# Altium PCB SensorThing v1.0.PcbDoc
Units mm, origin at the board's own origin, x right, y up, seen from the top; angles counter-clockwise.
Board outline 43 x 38.3 mm, 2 copper layers (Top Layer, Bottom Layer), stack 1.671 mm thick; 76 components, 67 nets, 323 pads, 306 vias.
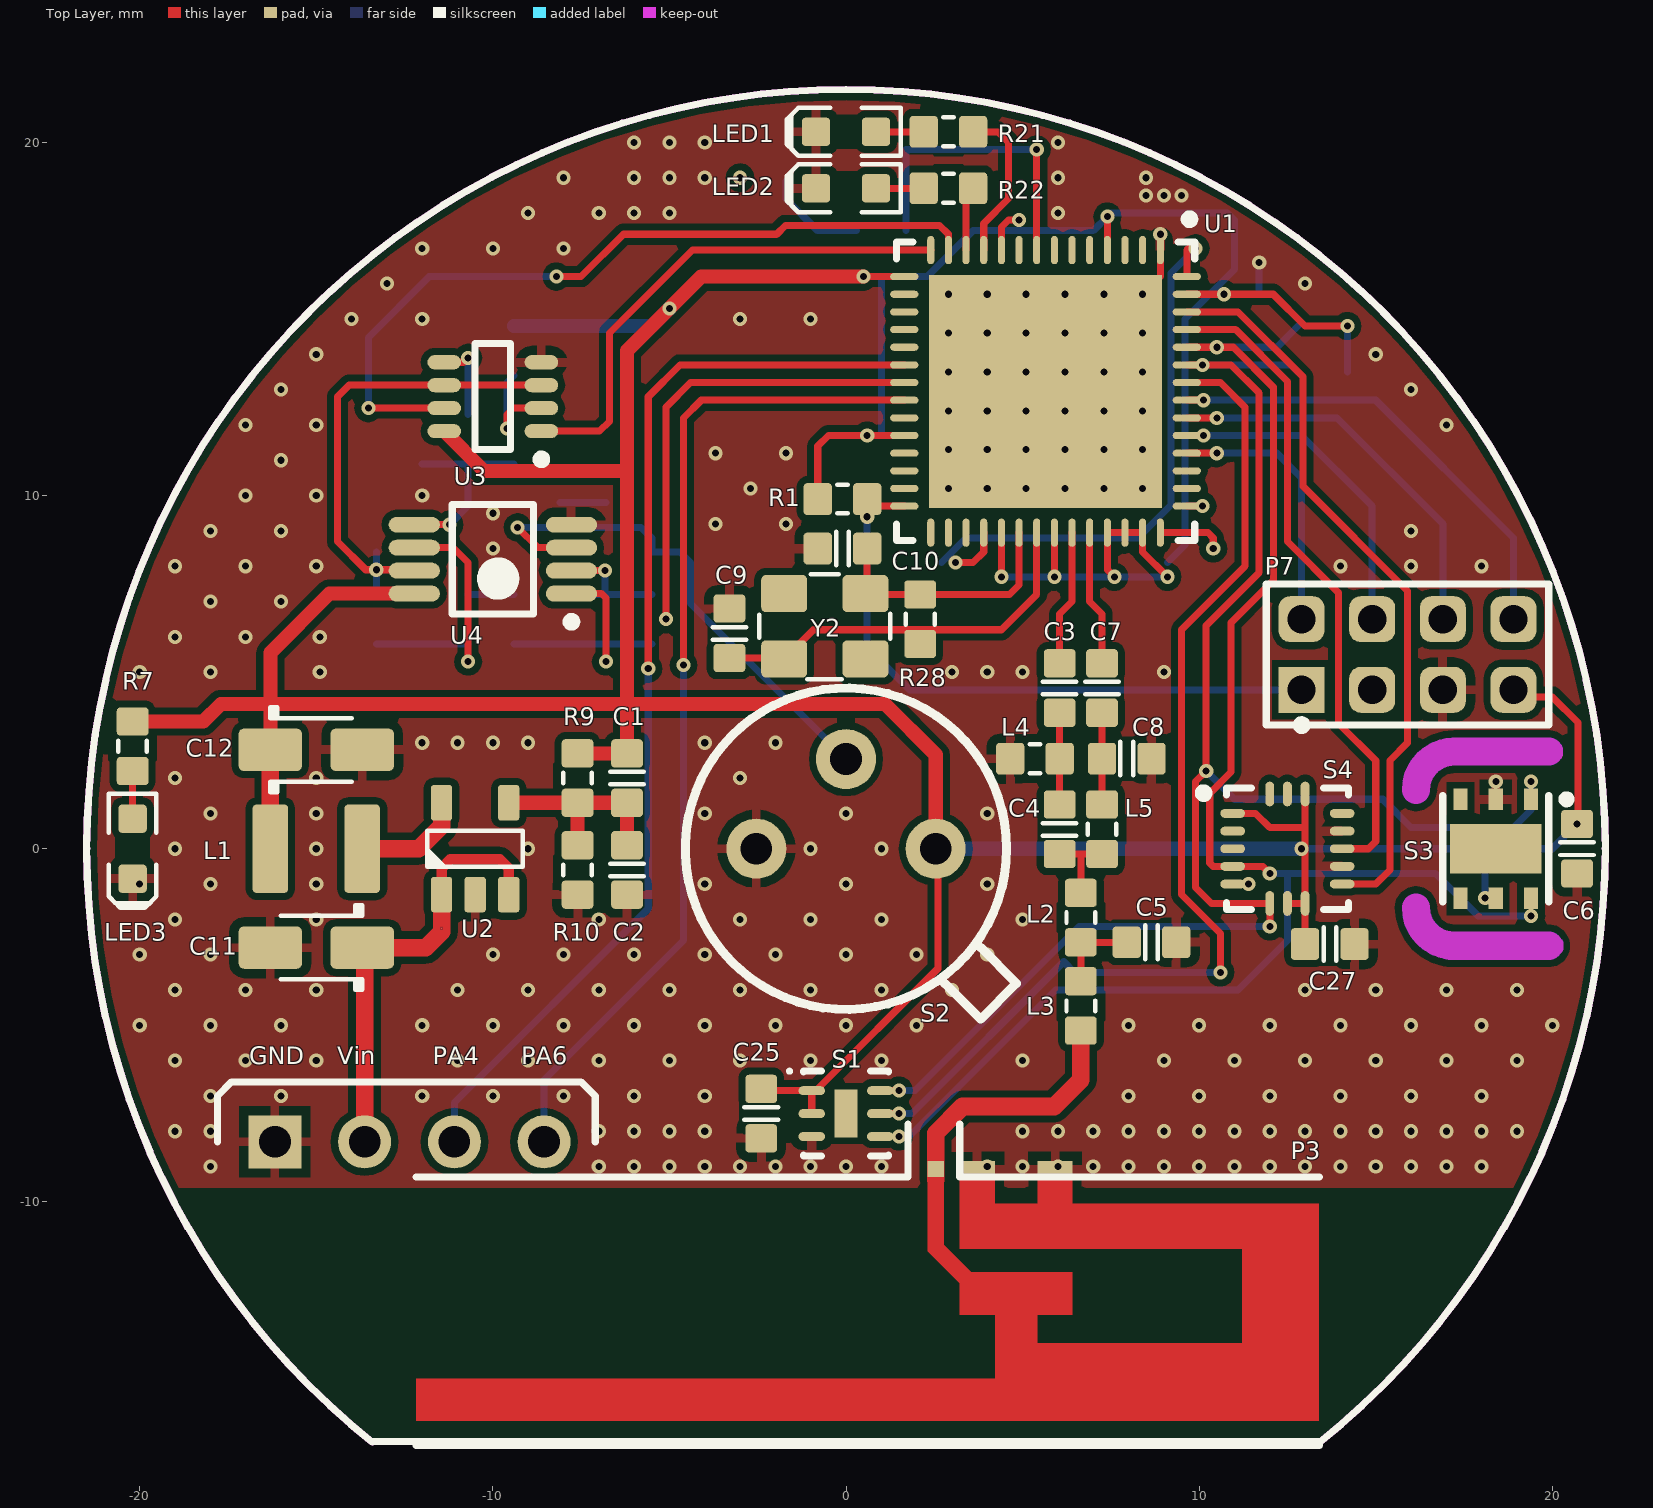
[diagram p0: Top Layer view]
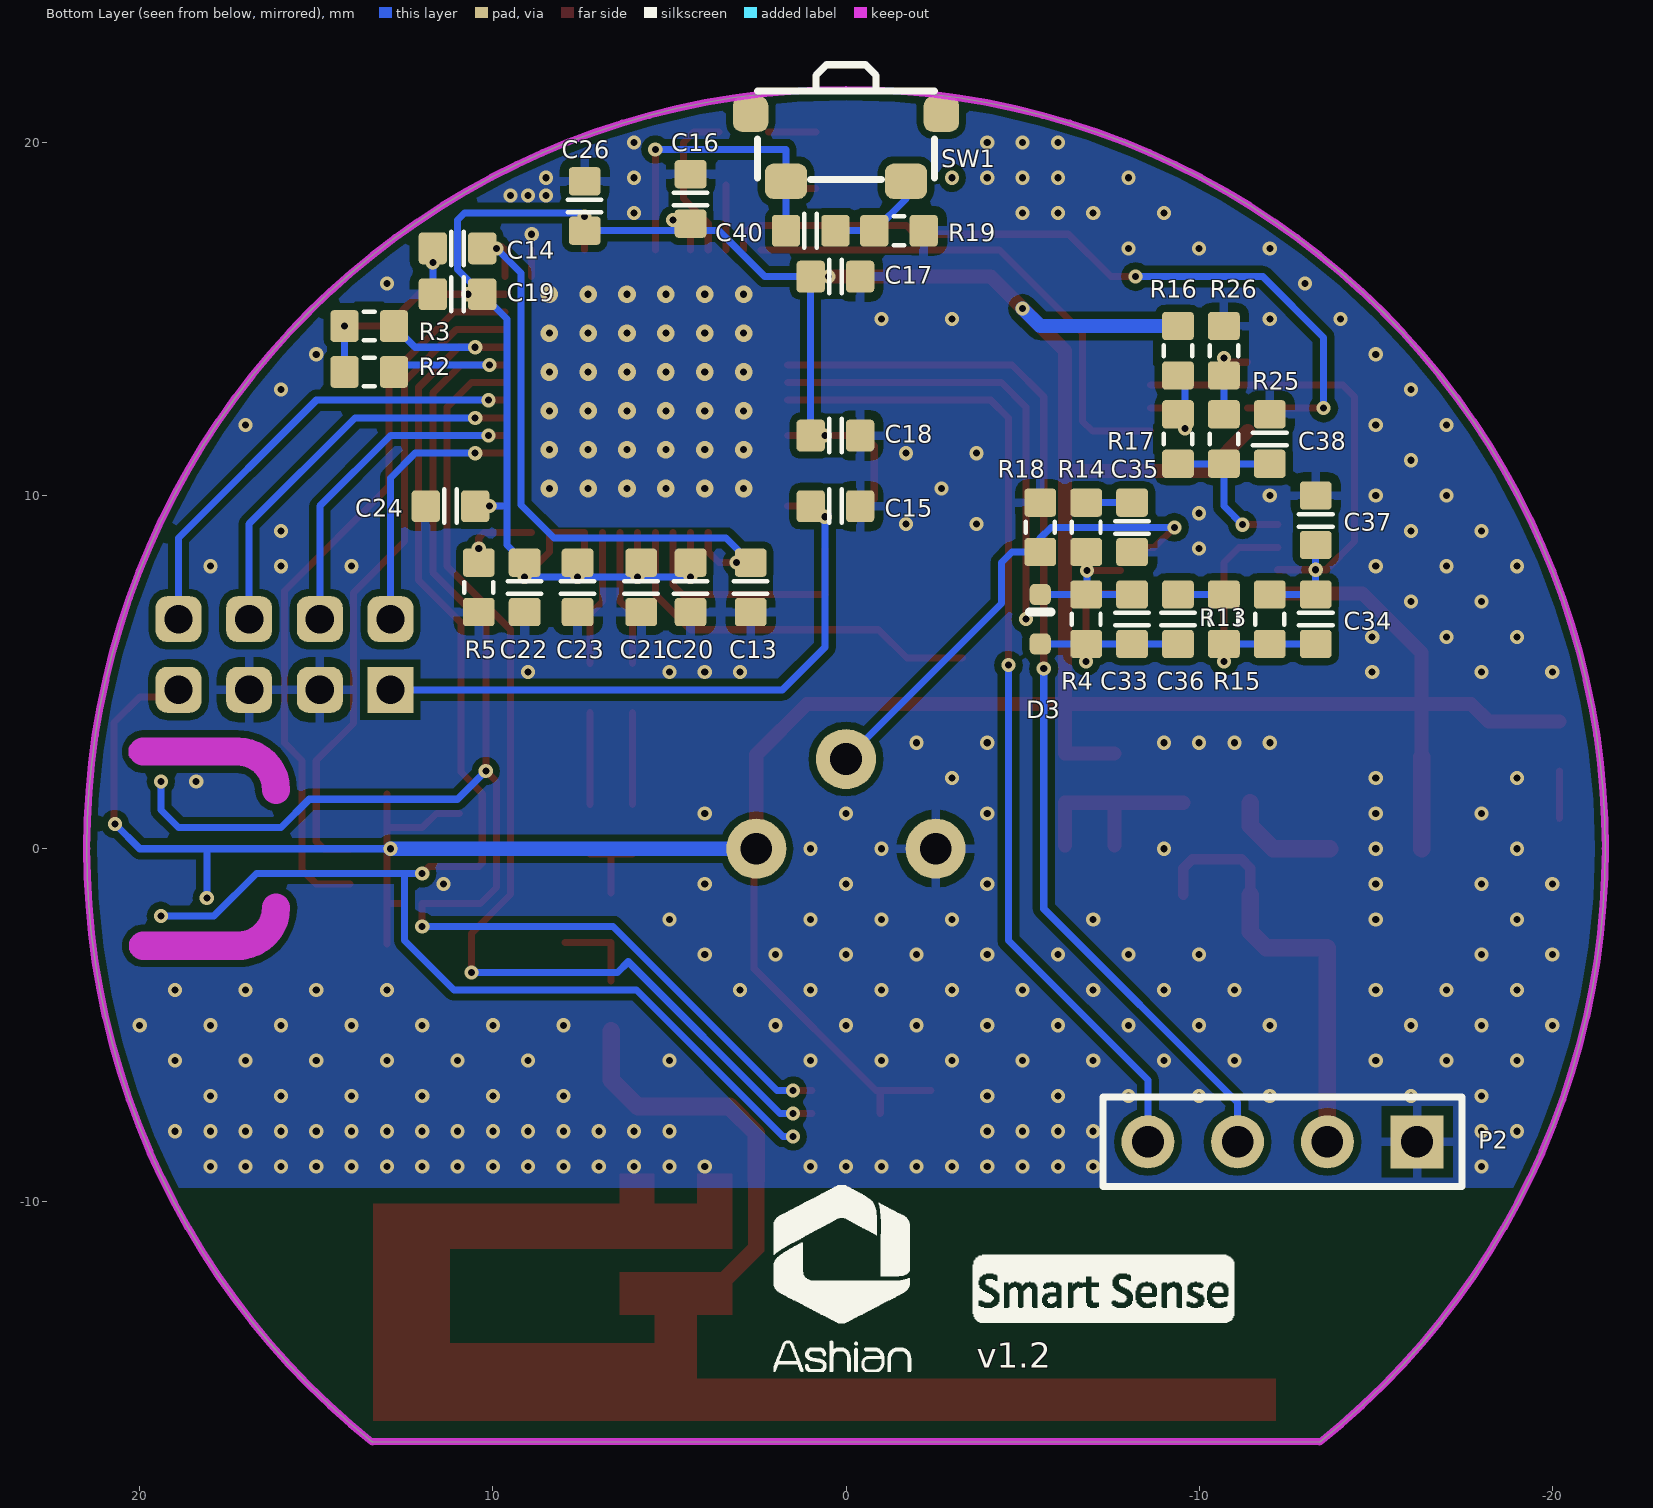
[diagram p1: Bottom Layer view, seen from below]
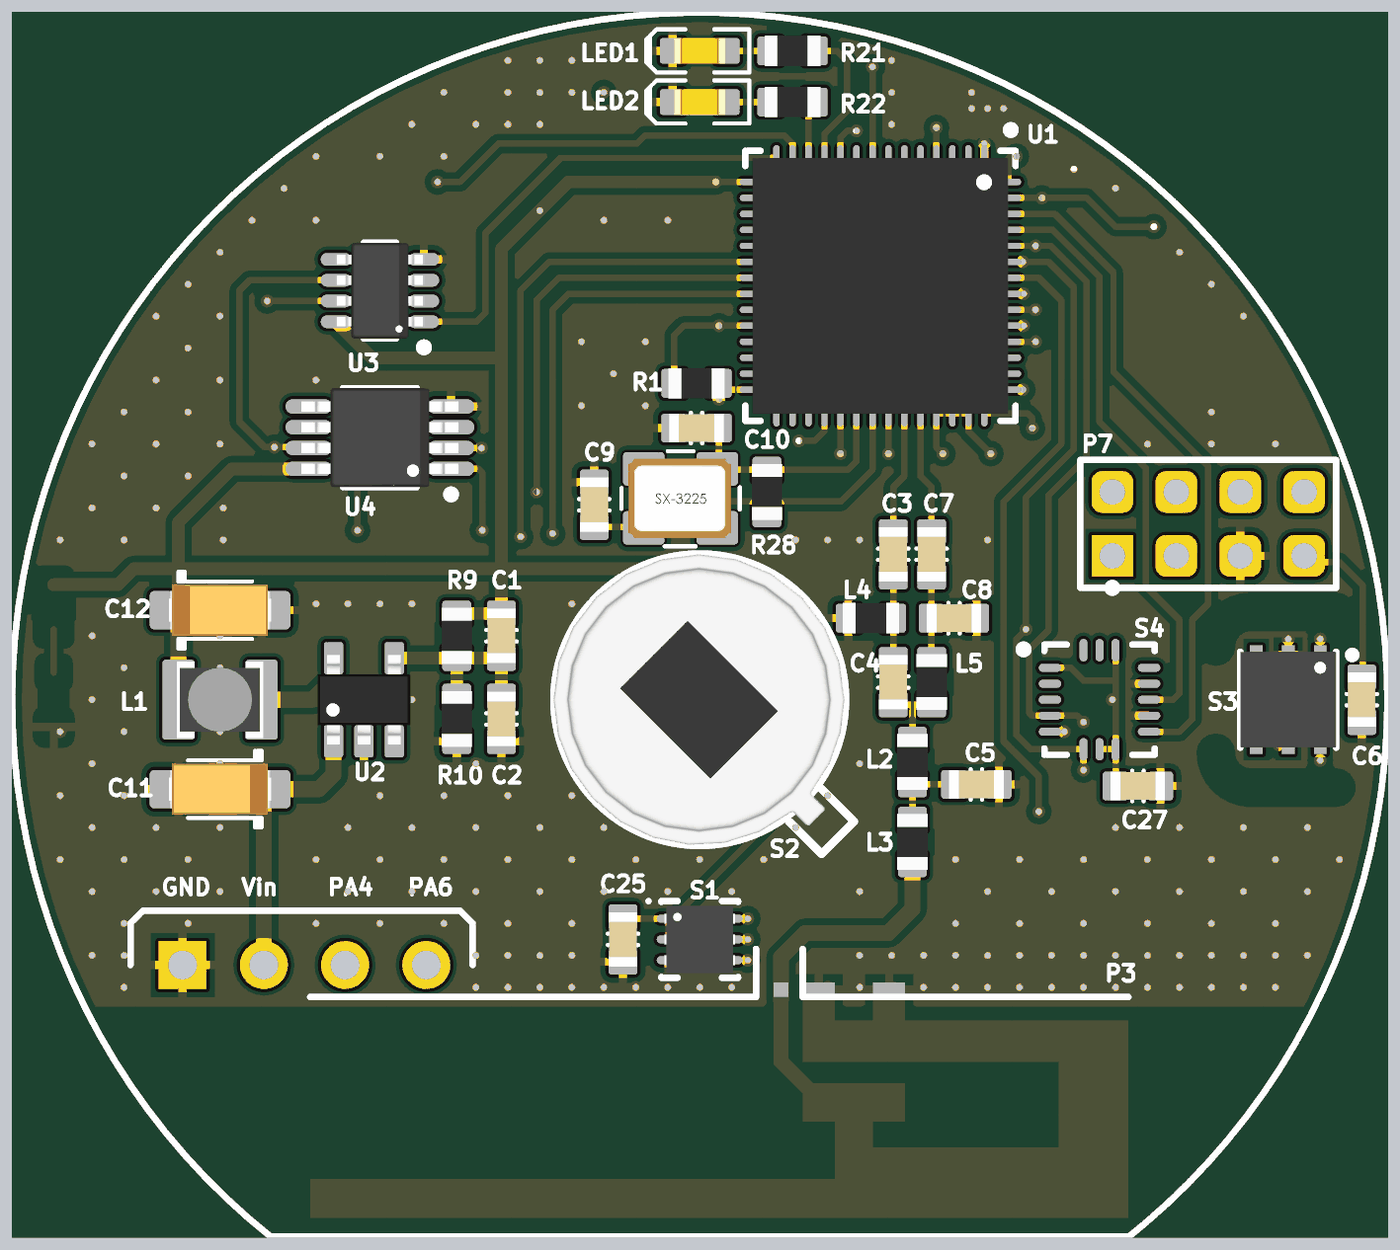
[diagram p2: 3D render of the assembled board from above, using the file's embedded part models]
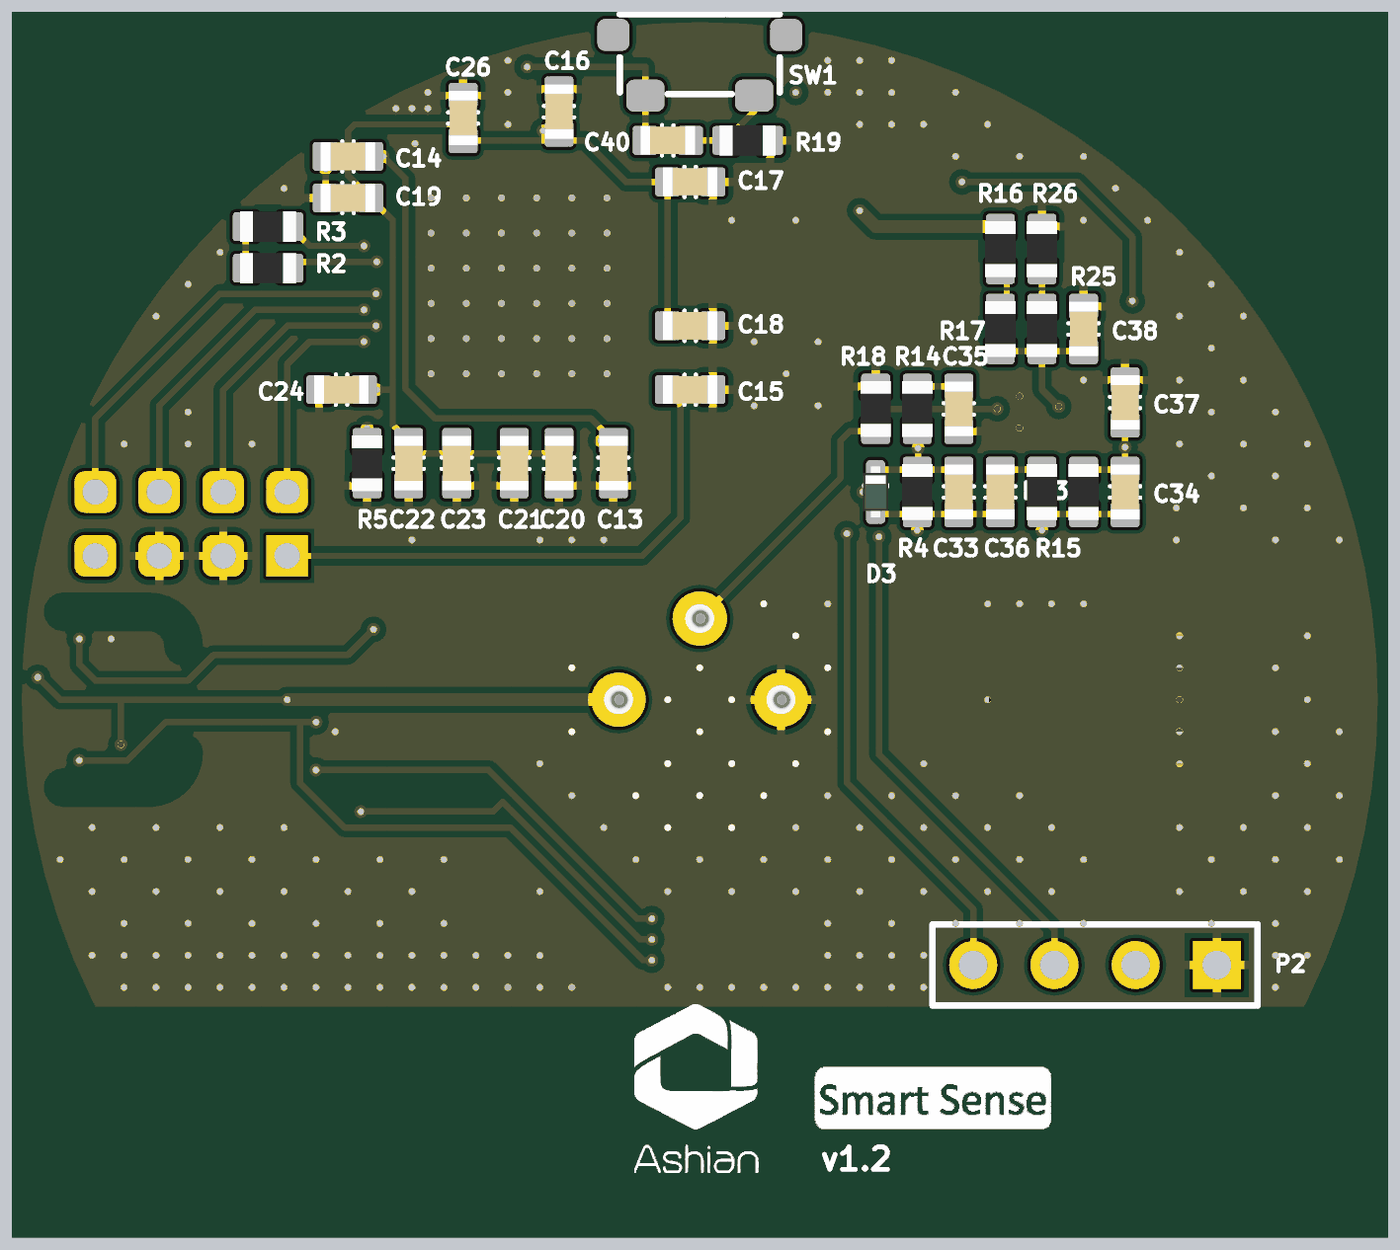
[diagram p3: 3D render of the assembled board from below, using the file's embedded part models]

## Layer stack, top to bottom
Top Solder: solder mask 0.0102, Solder Resist, Dk 3.5
Top Layer: signal copper 0.0356
Dielectric 1: dielectric 1.6, FR-4, Dk 4.8
Bottom Layer: signal copper 0.0356
Bottom Solder: solder mask 0.0102, Solder Resist, Dk 3.5

## Board outline
-13.411,-16.804 cw(c0,0) 13.411,-16.804 13.4,-16.79
cut-out: 20.1,-2.5 cw(c20.1,-2.7) 20.3,-2.7 20.3,-2.8 cw(c20.1,-2.8) 20.1,-3 17.2,-3 cw(c17.15,-1.65) 15.8,-1.7 cw(c16,-1.7) 16,-1.5 16.1,-1.5 cw(c16.1,-1.7) 16.3,-1.7 ccw(c17.1,-1.7) 17.1,-2.5
cut-out: 20.1,2.5 ccw(c20.1,2.7) 20.3,2.7 20.3,2.8 ccw(c20.1,2.8) 20.1,3 17.2,3 ccw(c17.15,1.65) 15.8,1.7 ccw(c16,1.7) 16,1.5 16.1,1.5 ccw(c16.1,1.7) 16.3,1.7 cw(c17.1,1.7) 17.1,2.5

## Design rules (kind name [scope] priority, off if disabled: settings)
Clearance [All] p1: gap=0.2
PolygonConnect PolygonConnect_IsVia [IsVia] p1: connectstyle=Direct reliefconductorwidth=0.254 reliefentries=4 polygonreliefangle="90 Angle" airgapwidth=0.254
PolygonConnect [All] p2: connectstyle=Relief reliefconductorwidth=0.254 reliefentries=4 polygonreliefangle="90 Angle" airgapwidth=0.254
RoutingVias [All] p1: holewidth=0.2 width=0.4 viastyle="Through Hole" minholewidth=0.2 minwidth=0.4 maxholewidth=0.3 maxwidth=0.5
SolderMaskExpansion [All] p1: expansion=0.102
Width [All] p1: maxlimit=2 minlimit=0.2 preferedwidth=0.2
30 further rules are at their usual default settings.

## Components (designator, comment, footprint, x,y, rotation, side; value= is the part's Value field where it differs from the comment)
C1 "Cap" "CAP 0603" -6.2,2 r270 top
C2 "Cap" "CAP 0603" -6.2,-0.6 r270 top
C3 "Cap" "CAP 0603" 6.05,4.55 r90 top
C4 "Cap" "CAP 0603" 6.05,0.55 r90 top
C5 "Cap" "CAP 0603" 8.65,-2.65 r0 top
C6 "Cap" "CAP 0603" 20.7,0 r270 top
C7 "Cap" "CAP 0603" 7.25,4.55 r90 top
C8 "Cap" "CAP 0603" 7.95,2.55 r0 top
C9 "Cap" "CAP 0603" -3.3,6.1 r90 top
C10 "Cap" "CAP 0603" -0.1,8.5 r180 top
C11 "Cap pol" "CAP A" -15,-2.8 r180 top
C12 "Cap pol" "CAP A" -15,2.8 r0 top
C13 "Cap" "CAP 0603" 2.7,7.4 r270 bottom
C14 "Cap" "CAP 0603" 11,17 r0 bottom
C15 "Cap" "CAP 0603" 0.3,9.7 r180 bottom
C16 "Cap" "CAP 0603" 4.4,18.4 r90 bottom
C17 "Cap" "CAP 0603" 0.3,16.2 r180 bottom
C18 "Cap" "CAP 0603" 0.3,11.7 r180 bottom
C19 "Cap" "CAP 0603" 11,15.7 r0 bottom
C20 "Cap" "CAP 0603" 4.4,7.4 r270 bottom
C21 "Cap" "CAP 0603" 5.8,7.4 r270 bottom
C22 "Cap" "CAP 0603" 9.1,7.4 r270 bottom
C23 "Cap" "CAP 0603" 7.6,7.4 r270 bottom
C24 "Cap" "CAP 0603" 11.2,9.7 r0 bottom
C25 "Cap" "CAP 0603" -2.4,-7.5 r270 top
C26 "Cap" "CAP 0603" 7.4,18.2 r90 bottom
C27 "Cap" "CAP 0603" 13.7,-2.7 r0 top
C33 "Cap" "CAP 0603" -8.1,6.5 r270 bottom
C34 "Cap" "CAP 0603" -13.3,6.5 r90 bottom
C35 "Cap" "CAP 0603" -8.1,9.1 r270 bottom
C36 "Cap" "CAP 0603" -9.4,6.5 r270 bottom
C37 "Cap" "CAP 0603" -13.3,9.3 r90 bottom
C38 "Cap" "CAP 0603" -12,11.6 r90 bottom
C40 "Cap" "CAP 0603" 1,17.5 r180 bottom
D3 "1N4148" SOD-523 -5.5,6.5 r90 bottom
L1 "Inductor power" "INDUCTOR 2520" -15,0 r180 top
L2 "Res" "RES 0603" 6.65,-1.95 r90 top
L3 "Res" "RES 0603" 6.65,-4.45 r90 top
L4 "Res" "RES 0603" 5.35,2.55 r0 top
L5 "Res" "RES 0603" 7.25,0.55 r90 top
LED1 "LED" "LED 0603" 0,20.3 r180 top
LED2 "LED" "LED 0603" 0,18.7 r180 top
LED3 "LED" "LED 0603" -20.2,0 r270 top
P2 "Header 4" HDR1X4 -16.17,-8.3 r0 bottom
P3 "2.4GHz PCB Antenna" "2.4 GHz Inverted F Antenna 1" 13.4,-9.3 r180 top locked
P7 "Header_2mm 4x2" "Header_2mm 4x2" 15.9,5.5 r270 top locked
R1 "Res" "RES 0603" -0.1,9.9 r180 top
R2 "Res" "RES 0603" 13.5,13.5 r180 bottom
R3 "Res" "RES 0603" 13.5,14.8 r180 bottom
R4 "Res" "RES 0603" -6.8,6.5 r270 bottom
R5 "Res" "RES 0603" 10.4,7.4 r270 bottom
R7 "Res" "RES 0603" -20.2,2.9 r270 top
R9 "Res" "RES 0603" -7.6,2 r270 top
R10 "Res" "RES 0603" -7.6,-0.6 r270 top
R13 "Res" "RES 0603" -12,6.5 r90 bottom
R14 "Res" "RES 0603" -6.8,9.1 r270 bottom
R15 "Res" "RES 0603" -10.7,6.5 r270 bottom
R16 "Res" "RES 0603" -9.4,14.1 r90 bottom
R17 "Res" "RES 0603" -9.4,11.6 r90 bottom
R18 "Res" "RES 0603" -5.5,9.1 r270 bottom
R19 "Res" "RES 0603" -1.5,17.5 r180 bottom
R21 "Res" "RES 0603" 2.9,20.3 r180 top
R22 "Res" "RES 0603" 2.9,18.7 r180 top
R25 "Res" "RES 0603" -10.7,11.6 r270 bottom
R26 "Res" "RES 0603" -10.7,14.1 r270 bottom
R28 "Res" "RES 0603" 2.1,6.5 r90 top
S1 "OPT3001" USON-6pin 0,-7.5 r0 top
S2 "D203B" D203B 0,0 r0 top locked
S3 "SHT20" SHT20 18.4,0 r180 top
S4 "LIS3DH" LGA16-3X3X1_N 12.5,0 r0 top
SW1 "Switch" "SWITCH SIDE-B3U" 0,20.2 r180 bottom
U1 "CC2538" PVQFN56-CC2538 5.65,12.95 r270 top
U2 "TPS62200" SOT23-5 -10.5,0 r90 top
U3 "TLV3492" "TSOP 8" -10,12.8 r180 top
U4 "LPV802" "VSSOP 8-Pin" -10,8.2 r180 top
Y2 "Crystal" "Crystal 3225" -0.6,6.3 r0 top

## Footprints (in the part's own frame and the unit in brackets; to place one, negate y for a bottom-side part, rotate by r counter-clockwise, add the part's x,y. Pads: shape width x height; smd on the part's side, far side on the other; paste and mask are expansions set on the pad)
"2.4 GHz Inverted F Antenna 1" [mm]
  rect 1x0.46 smd: 1(7.48,-0.23) 1(9.68,-0.23)
  rect 0.46x0.46 smd: 2(10.86,-0.23)
  Top Layer region: 0,5.7 25.58,5.7 25.58,6.91 0,6.91
  Top Layer region: 0,4.7 8.08,4.7 8.08,5.8 0,5.8
  Top Layer region: 7.98,3.7 9.18,3.7 9.18,5.8 7.98,5.8
  Top Layer region: 6.98,2.69 10.18,2.69 10.18,3.9 6.98,3.9
  Top Layer region: 0,1.93 2.18,1.93 2.18,4.8 0,4.8
  Top Layer region: 0,0.74 10.18,0.74 10.18,2.03 0,2.03
  Top Layer region: 6.98,-0.1 7.98,-0.1 7.98,0.84 6.98,0.84
  Top Layer region: 9.18,-0.1 10.18,-0.1 10.18,0.84 9.18,0.84
  Top Layer region: 10.63,-0.1 11.09,-0.1 11.09,2.1 10.63,2.1
  Top Layer region: 10.765,1.775 11.09,2.1 10.175,3.015 9.85,2.69
  silkscreen extent 0,-1.5 25.58,7.59
"CAP 0603" [mm] "Chip Capacitor, Body 1.6x0.8mm, EIA 0603, IPC Medium Density"
  round 0.254 on Mech15: 0(0,0)
  rrect25% 0.8x0.9 smd: 1(-0.7,0) 2(0.7,0)
  Top Layer pour cut-out: -0.6,0.5 -0.465,0.635 0.465,0.635 0.6,0.5 0.6,-0.5 0.465,-0.635 -0.465,-0.635 -0.6,-0.5
  silkscreen extent -0.18,-0.48 0.18,0.48, body extent -0.85,-0.45 0.85,0.45, height 0.89
"CAP A" [mm] "CAP A - 3216"
  round 0.508 on Mech15: 0(0,0)
  rrect25% 1.8x1.2 smd: 1(-1.3,0) 2(1.3,0)
  silkscreen extent -1.3,-1.2 1,1.2, body extent -1.6,-0.8 1.6,0.8, height 1.8
"Crystal 3225" [mm]
  round 0.508 on Mech15: 0(-0.025,0)
  rrect25% 1.3x1.05 smd mask+0.075: 1(-1.15,-0.925) 2(1.15,0.925) NC(-1.15,0.925) NC(1.15,-0.925)
  silkscreen extent -1.85,-1.5 1.85,1.47, body extent -1.62,-1.25 1.58,1.25, height 0.81
D203B [mm] "PIR sensor"
  round 1.7 hole 0.9: 1(2.54,0) 2(0,2.54) 3(-2.54,0)
  silkscreen extent -4.55,-4.83 4.83,4.55, body extent -4.57,-4.55 4.53,4.55, height 4.7
HDR1X4 [mm] "Connector; Header; 4 Position"
  rect 1.5x1.5 hole 0.9: 1(0,0)
  round 1.5 hole 0.9: 2(2.54,0) 3(5.08,0) 4(7.62,0)
  silkscreen extent -1.27,-1.27 8.89,1.27
"Header_2mm 4x2" [mm] "Header_2mm 4x2"
  rect 1.3x1.3 hole 0.8: 1(1,-3)
  rrect50% 1.3x1.3 hole 0.8: 2(-1,-3) 3(1,-1) 4(-1,-1) 5(1,1) 6(-1,1) 7(1,3) 8(-1,3)
  silkscreen extent -2,-4 2.12,4
"INDUCTOR 2520" [mm] "Precision Wire Wound Inductor, 2-Leads, Body 2.50x2.00mm, IPC Medium Density"
  rrect20% 1x2.5 smd: 1(-1.3,0) 2(1.3,0)
  body extent -1.35,-1.2 1.35,1.2, height 2.1
"LED 0603" [mm]
  round 0.254 on Mech15: 0(0,0)
  rrect25% 0.8x0.8 smd: 1(-0.85,0) 2(0.85,0)
  Top Layer pour cut-out: -0.5,0.5 0.5,0.5 0.5,-0.5 -0.5,-0.5
  silkscreen extent -1.55,-0.67 1.68,0.67, body extent -0.8,-0.4 0.8,0.4, height 0.75
LGA16-3X3X1_N [mm] "PQFN, 16-Leads, Body 3x3mm, Pitch 0.5mm, IPC Medium Density"
  oval 0.7x0.25 smd: 1(-1.55,1) 2(-1.55,0.5) 3(-1.55,0) 4(-1.55,-0.5) 5(-1.55,-1) 9(1.55,-1) 10(1.55,-0.5) 11(1.55,0) 12(1.55,0.5) 13(1.55,1)
  oval 0.25x0.7 smd: 6(-0.5,-1.55) 7(0,-1.55) 8(0.5,-1.55) 14(0.5,1.55) 15(0,1.55) 16(-0.5,1.55)
  silkscreen extent -2.5,-1.73 1.72,1.73, body extent -1.58,-1.58 1.58,1.58, height 1
PVQFN56-CC2538 [mm] "QFN, 56-Leads, Body 8.00x8.00mm, Pitch 0.50mm, Thermal Pad 6.60x6.60mm, IPC Medium Density"
  oval 0.8x0.2 smd: 1(-4,3.25) 2(-4,2.75) 3(-4,2.25) 4(-4,1.75) 5(-4,1.25) 6(-4,0.75) 7(-4,0.25) 8(-4,-0.25) 9(-4,-0.75) 10(-4,-1.25) 11(-4,-1.75) 12(-4,-2.25) 13(-4,-2.75) 14(-4,-3.25) 29(4,-3.25) 30(4,-2.75) 31(4,-2.25) 32(4,-1.75) 33(4,-1.25) 34(4,-0.75) 35(4,-0.25) 36(4,0.25) 37(4,0.75) 38(4,1.25) 39(4,1.75) 40(4,2.25) 41(4,2.75) 42(4,3.25)
  oval 0.2x0.8 smd: 15(-3.25,-4) 16(-2.75,-4) 17(-2.25,-4) 18(-1.75,-4) 19(-1.25,-4) 20(-0.75,-4) 21(-0.25,-4) 22(0.25,-4) 23(0.75,-4) 24(1.25,-4) 25(1.75,-4) 26(2.25,-4) 27(2.75,-4) 28(3.25,-4) 43(3.25,4) 44(2.75,4) 45(2.25,4) 46(1.75,4) 47(1.25,4) 48(0.75,4) 49(0.25,4) 50(-0.25,4) 51(-0.75,4) 52(-1.25,4) 53(-1.75,4) 54(-2.25,4) 55(-2.75,4) 56(-3.25,4)
  rect 6.6x6.6 smd: 57(0,0)
  silkscreen extent -5,-4.23 4.23,4.23, body extent -4,-4 4,4, height 0.77
"RES 0603" [mm] "Chip Resistor, Body 1.6x0.8mm, EIA 0603, IPC Medium Density"
  round 0.254 on Mech15: 0(0,0)
  rrect25% 0.8x0.9 smd: 1(-0.7,0) 2(0.7,0)
  Top Layer pour cut-out: -0.6,0.5 -0.4,0.7 0.4,0.7 0.6,0.5 0.6,-0.5 0.4,-0.7 -0.4,-0.7 -0.6,-0.5
  silkscreen extent -0.15,-0.41 0.15,0.41, body extent -0.87,-0.47 0.88,0.48, height 0.54
SHT20 [mm]
  rect 2.6x1.4 smd: 0(0,0)
  rect 0.4x0.6 smd: 1(-1,-1.4) 2(0,-1.4) 3(1,-1.4) 4(1,1.4) 5(0,1.4) 6(-1,1.4)
  silkscreen extent -2.1,-1.5 1.5,1.5, body extent -1.5,-1.5 1.5,1.5, height 1.1
SOD-523 [mm]
  rrect50% 0.6x0.6 smd: 1(-0.7,0) 2(0.7,0)
  silkscreen extent 0.2,-0.3 0.2,0.3, body extent -0.8,-0.4 0.8,0.4, height 0.7
SOT23-5 [mm]
  round 0.5 on Mech15: 0(0,0)
  rrect25% 1x0.6 smd: 1(-1.3,0.95) 2(-1.3,0) 3(-1.3,-0.95) 4(1.3,-0.95) 5(1.3,0.95)
  silkscreen extent -0.51,-1.35 0.51,1.35, body extent -1.4,-1.45 1.4,1.45, height 1.44
"SWITCH SIDE-B3U" [mm] "Omron B3U Tactile Switch-Side-actuated Model"
  rrect50% 1x1 smd: 0(-2.7,0.6) 0(2.7,0.6)
  rrect50% 1.2x1 smd: 1(-1.7,-1.3) 2(1.7,-1.3)
  silkscreen extent -2.5,-1.25 2.5,2
"TSOP 8" [mm]
  oval 0.95x0.4 smd: 1(-1.375,0.975) 2(-1.375,0.325) 3(-1.375,-0.325) 4(-1.375,-0.975) 5(1.375,-0.975) 6(1.375,-0.325) 7(1.375,0.325) 8(1.375,0.975)
  silkscreen extent -1.5,-1.5 0.5,1.9, body extent -1.39,-1.5 1.39,1.5, height 1.1
USON-6pin [mm] "USON-6pin"
  oval 0.75x0.25 smd: 1(-0.97,0.65) 2(-0.97,0) 3(-0.97,-0.65) 4(0.97,-0.65) 5(0.97,0) 6(0.97,0.65)
  rect 0.65x1.35 smd: 7(0,0)
  silkscreen extent -1.65,-1.2 1.2,1.25, body extent -1.1,-1.05 1.1,1.05, height 0.65
"VSSOP 8-Pin" [mm]
  oval 1.45x0.45 smd: 1(-2.225,0.975) 2(-2.225,0.325) 3(-2.225,-0.325) 4(-2.225,-0.975) 5(2.225,-0.975) 6(2.225,-0.325) 7(2.225,0.325) 8(2.225,0.975)
  silkscreen extent -2.35,-1.55 1.15,1.9, body extent -2.45,-1.55 2.45,1.55, height 1.1

## Part data
D3: library part Diode
L2 L3 L4 L5 R1 R2 R3 R4 R5 R7 R9 R10 R13 R14 R15 R16 R17 R18 R19 R21 R22 R25 R26 R28: "Resistor"
LED1 LED2 LED3: library part "LED SMD", "LED SMD"
P2: "Header, 4-Pin"
S2: library part "D203B PIR sensor"
S4: "MEMS digital output motion sensor: Ultra low-power high performance 3-axis nano accelerometer, -40 to +85°C, LGA-16 (3x3x1), Tray"
SW1: "micro Switch"
U2: library part TPS6220, "NAND gate"
Y2: library part Xtal

## Via types
v1: diameter 0.4, hole 0.2, Top Layer to Bottom Layer, tented both sides, 270 vias
v2: diameter 0.5, hole 0.2, Top Layer to Bottom Layer, tented both sides, 36 vias

## Nets (pads, with @x,y where several pads share a name; then routed paths per layer and width w, separated by ;. In a path a pad name is that pad's centre, name@x,y a point inside that pad or via, vN(x,y) a via of type N, cw(c..) or ccw(c..) an arc to the next point about the centre after c; other vN are vias at no path point)
32K_Q1: U1.44
32K_Q2: U1.45
32M_Q1: C10.1 R28.2 U1.34 Y2.2 | length 7.1
  Top Layer w0.2: Y2.2@0.575,7.2 4.634,7.2 4.9,7.466 U1.34 ; Y2.2@0.6,7.275 C10.1
32M_Q2: C9.1 R28.1 U1.35 Y2.1 | length 11.2
  Top Layer w0.2: C9.1 -1.725,5.4 -0.925,6.2 4.4,6.2 5.4,7.2 U1.35
+3.3V: C1.1 C6.1 C12.1 C16.1 C17.1 C18.1 C19.1 C20.1 C21.1 C22.1 C23.1 C24.1 C25.1 C26.1 C27.1 L1.2 P7.7 R1.2 R2.1 R3.1 R7.1 R9.1 R16.2 S1.1 S1.2 S2.1 S3.5 S4.1 S4.7 S4.8 S4.14 U1.4 U1.10 U1.15 U1.24 U1.33 U1.36 U1.39 U1.40 U1.41 U1.43 U1.55 U3.8 U4.8 | length 161
  Top Layer w0.2: C25.1@-2.4,-6.85 S1.1 ; S1.2 S1.1 ; R1.2 -0.8,11.4 -0.5,11.7 v1(0.6,11.7) U1.24 ; v1@0.4,16.2 U1.15 ; S2.1 2.6,-0.06 2.6,-3.4 -0.85,-6.85 S1.1 ; v1(4.4,7.7) U1.33 ; U1.10 4.4,17.6 4.6,17.8 v1(4.9,17.8) ; v1(5.9,7.7) U1.36 ; U1.4 v1(7.4,17.9) ; v1(7.6,7.7) 7.4,7.9 U1.39 U1.40 U1.41 8.4,8.4 v1(9.1,7.7) ; U1.43 v1(10.1,9.7) ; U1.55 v1(10.7,15.7) 12.1,15.7 13,14.8 v1(14.2,14.8) ; S4.1 11.6,1 12,0.6 13,0.6 ; S4.7 S4.8 ; C27.1 S4.8 ; S4.14 13,0.6 ; P7.7@18.9,4.3 20,4.3 20.725,3.575 C6.1@20.725,0.7 ; S4.8 13,0.6
  Top Layer w0.4: R7.1 -18.2,3.6 -17.7,4.1 1.1,4.1 2.54,2.66 S2.1 ; C12.1@-16.3,2.6 -16.3,5.549 -14.624,7.225 U4.8 ; U3.8 -10.25,10.7 -6.2,10.7 ; R9.1 C1.1 -6.2,10.7 ; v1(0.5,16.2) -4.1,16.2 -6.2,14.1 -6.2,10.7
  Top Layer w0.5: L1.2 C12.1@-16.3,2.6
  Bottom Layer w0.2: C18.1 C17.1 2.3,16.2 3.6,17.5 7,17.5 v1(7.4,17.9) 7.5,18 10.8,18 11,17.8 11,16.4 ; v1(4.4,7.7) v1(9.1,7.7) ; C22.1 9.6,8.6 9.6,15 10.983,16.382 ; 9.6,9.7 v1(10.1,9.7) ; v1(12.9,0) 20,0 v1(20.7,0.7) ; R2.1 v1(14.2,14.8) ; v1(18.1,-1.4) 18.1,0
  Bottom Layer w0.4: R16.2 -5.5,14.8 v1(-5,15.3) ; S2.1 v1(12.9,0)
ACC_INT1: S4.11 U1.53 | length 18.6
  Top Layer w0.2: U1.53 11.034,14.7 12.5,13.234 12.5,8.7 13.95,7.25 13.95,3.55 15,2.5 15,0.2 14.8,0 S4.11
ACC_INT2: S4.9 U1.54 | length 21
  Top Layer w0.2: U1.54 11.1,15.2 12.936,13.364 12.936,10.264 15.9,7.3 15.9,3 15.4,2.5 15.4,-0.6 15,-1 S4.9
ADC6: P2.4 U1.22 | length 28.6
  Top Layer w0.2: v1(-4.6,5.2) -4.6,12.2 -4.1,12.7 U1.22
  Bottom Layer w0.2: P2.4 -8.55,-6.55 -4.6,-2.6 v1(-4.6,5.2)
ADC7: U1.23
ALS_INT1: S1.5 U1.50 | length 30.7
  Top Layer w0.2: S1.5 v1(1.5,-7.5) ; U1.50 10.6,13.2 11.3,12.5 11.3,8 9.5,6.2 9.5,-1.3 10.6,-2.4 v1(10.6,-3.5)
  Bottom Layer w0.2: v1(1.5,-7.5) 1.866,-7.5 6.166,-3.2 6.466,-3.5 v1(10.6,-3.5)
D+: U1.2
D-: U1.3
GND: C2.2 C5.2 C6.2 C8.2 C9.2 C10.2 C11.2 C12.2 C13.2 C14.2 C15.2 C16.2 C17.2 C18.2 C19.2 C20.2 C21.2 C22.2 C23.2 C24.2 C25.2 C26.2 C27.2 C35.2 C37.2 C38.2 L4.1 LED1.2 LED2.2 LED3.2 P2.1 P3.1 P7.3 P7.5 R5.2 R10.2 R18.1 R19.2 R26.1 S1.3 S2.3 S3.2 S4.5 S4.10 S4.12 U1.1 U1.57 U2.2 U3.4 U4.4 | length 1.7
  Top Layer w0.2: U1.57@8.9,16.2 U1.1
  Bottom Layer w0.2: C19.2 v1(11.7,16.6)
  other v1: -18,-9 -7,-9 -6,-9 -5,-9 -4,-9 -3,-9 -2,-9 -1,-9 0,-9 1,-9 4,-9 5,-9 6,-9 7,-9 8,-9 9,-9 10,-9 11,-9 12,-9 13,-9 14,-9 15,-9 16,-9 17,-9 18,-9 -19,-8 -18,-8 -7,-8 -6,-8 -5,-8 -4,-8 5,-8 6,-8 7,-8 8,-8 9,-8 10,-8 11,-8 12,-8 13,-8 14,-8 15,-8 16,-8 17,-8 18,-8 19,-8 -18,-7 -16,-7 -12,-7 -10,-7 -8,-7 -6,-7 -4,-7 8,-7 10,-7 12,-7 14,-7 16,-7 18,-7 -19,-6 -17,-6 -15,-6 -11,-6 -9,-6 -7,-6 -5,-6 -3,-6 -1,-6 1,-6 5,-6 9,-6 11,-6 13,-6 15,-6 17,-6 19,-6 -20,-5 -18,-5 -16,-5 -12,-5 -10,-5 -8,-5 -6,-5 -4,-5 -2,-5 0,-5 2,-5 8,-5 10,-5 12,-5 14,-5 16,-5 18,-5 20,-5 -19,-4 -17,-4 -15,-4 -11,-4 -9,-4 -7,-4 -5,-4 -3,-4 -1,-4 1,-4 3,-4 13,-4 15,-4 17,-4 19,-4 -20,-3 -18,-3 -10,-3 -8,-3 -6,-3 -4,-3 -2,-3 0,-3 2,-3 4,-3 -19,-2 -15,-2 -7,-2 -3,-2 -1,-2 1,-2 5,-2 -20,-1 -18,-1 -15,-1 -4,-1 0,-1 4,-1 11.4,-1 -19,0 -15,0 -9,0 -1,0 1,0 -18,1 -15,1 -4,1 0,1 4,1 18.4,1.9 -19,2 -15,2 -3,2 -12,3 -11,3 -10,3 -9,3 -4,3 -2,3 -20,5 -18,5 -14.9,5 3,5 4,5 5,5 9,5 -19,6 -17,6 -14.9,6 -18,7 -16,7 -19,8 -17,8 -15,8 14,8 16,8 18,8 -10,8.5 -18,9 -16,9 16,9 -3.7,9.2 -1.7,9.2 -10,9.5 -17,10 -15,10 -12,10 -2.7,10.2 -16,11 -3.7,11.2 -1.7,11.2 -17,12 -15,12 17,12 -16,13 16,13 -15,14 15,14 -14,15 -12,15 -3,15 -1,15 -13,16 13,16 -12,17 -10,17 -8,17 8.9,17.4 -9,18 -7,18 -6,18 -5,18 6,18 8.5,18.5 9,18.5 9.5,18.5 -8,19 -6,19 -5,19 -4,19 6,19 8.5,19 -6,20 -5,20 -4,20 6,20
  other v2: 2.9,10.2 4,10.2 5.1,10.2 6.2,10.2 7.3,10.2 8.4,10.2 2.9,11.3 4,11.3 5.1,11.3 6.2,11.3 7.3,11.3 8.4,11.3 2.9,12.4 4,12.4 5.1,12.4 6.2,12.4 7.3,12.4 8.4,12.4 2.9,13.5 4,13.5 5.1,13.5 6.2,13.5 7.3,13.5 8.4,13.5 2.9,14.6 4,14.6 5.1,14.6 6.2,14.6 7.3,14.6 8.4,14.6 2.9,15.7 4,15.7 5.1,15.7 6.2,15.7 7.3,15.7 8.4,15.7
LED1: R21.1 U1.11 | length 4.5
  Top Layer w0.2: R21.1 4.3,20.3 4.6,20 4.6,18.407 3.9,17.707 U1.11
LED2: R22.1 U1.12 | length 1.8
  Top Layer w0.2: U1.12 R22.1@3.4,18.8
NetC1_2: C1.2 C2.1 R9.2 R10.1 U2.4 | length 5.7
  Top Layer w0.4: U2.4 R9.2 ; R10.1 R9.2 ; C2.1 C1.2 R9.2
NetC3_1: C3.1 C4.2 L4.2 | length 2.6
  Top Layer w0.2: C4.2 L4.2 C3.1
NetC3_2: C3.2 U1.37 | length 3.8
  Top Layer w0.2: C3.2 6.05,6.65 6.4,7 U1.37
NetC4_1: C4.1 L2.2 L5.1 | length 2.3
  Top Layer w0.2: C4.1 6.65,-0.15 ; L2.2 6.65,-0.15 ; L5.1 6.65,-0.15
NetC5_1: C5.1 L2.1 L3.2 | length 2.4
  Top Layer w0.2: L3.2 L2.1 C5.1
NetC7_1: C7.1 C8.1 L5.2 | length 2.6
  Top Layer w0.2: L5.2 C7.1
NetC7_2: C7.2 U1.38 | length 3.8
  Top Layer w0.2: U1.38 6.9,7 7.25,6.65 C7.2
NetC13_1: C13.1 C14.1 U1.32 U1.56 | length 17.4
  Top Layer w0.2: v1(3.1,8.1) 3.6,8.1 3.9,8.4 U1.32 ; U1.56 9.65,16.95 9.75,17.05 9.9,16.9 v1(9.9,17)
  Bottom Layer w0.2: C13.1 3.4,8.8 8.267,8.8 9.2,9.733 9.2,16.3 v1(9.9,17)
NetC33_1: C33.1 D3.2 R4.1 R14.2 U4.2 | length 4.2
  Top Layer w0.2: U4.2 v1(-6.825,7.875)
  Bottom Layer w0.2: C33.1 -6.825,7.2 v1(-6.825,7.875) ; R4.1 D3.2
NetC33_2: C33.2 C36.2 D3.1 R4.2 U4.1 | length 6.7
  Top Layer w0.2: U4.1 -6.925,7.225 -6.8,7.1 v1(-6.8,5.3)
  Bottom Layer w0.2: C36.2 C33.2 R4.2 D3.1
NetC34_1: C34.1 R13.1 R15.2 U4.6 | length 7.1
  Top Layer w0.2: U4.6 -11.125,8.525 -10.7,8.1 v1(-10.7,5.3)
  Bottom Layer w0.2: C34.1 R13.1 R15.2
NetC34_2: C34.2 C37.1 R13.2 U3.3 U3.6 U4.7 | length 15
  Top Layer w0.2: U4.7@-12.225,7.9 -13.6,7.9 -14.4,8.7 -14.4,12.8 -14.075,13.125 U3.6 U3.3
  Bottom Layer w0.2: C37.1@-13.3,8.4 C34.2 R13.2
  other v1: -13.3,7.9
NetC35_1: C35.1 R14.1 | length 1.3
  Bottom Layer w0.2: C35.1 R14.1
NetC36_1: C36.1 R15.1 | length 1.3
  Bottom Layer w0.2: R15.1 C36.1
NetC40_2: C40.2 R19.1 SW1.2 | length 2.9
  Bottom Layer w0.2: SW1.2 -1.7,18.4 R19.1 C40.2
NetL1_1: L1.1 U2.5 | length 3.2
  Top Layer w0.5: L1.1 -12.1,0 -11.45,0.65 U2.5
NetL3_1: L3.1 P3.2 | length 7.4
  Top Layer w0.5: 2.54,-9.37 2.54,-8.06 3.3,-7.3 5.9,-7.3 6.65,-6.55 L3.1
NetLED1_1: LED1.1 R21.2 | length 1.4
  Top Layer w0.2: LED1.1 R21.2
NetLED2_1: LED2.1 R22.2 | length 1.4
  Top Layer w0.2: LED2.1 R22.2
NetLED3_1: LED3.1 R7.2 | length 1.4
  Top Layer w0.2: LED3.1 R7.2
NetR5_1: R5.1 U1.42 | length 1.9
  Top Layer w0.2: U1.42 10.25,8.95 10.4,8.8 v1(10.4,8.5)
NetR16_1: R16.1 R17.2 U3.2 | length 3.2
  Top Layer w0.2: v1(-9.6,11.9) -9.6,12.3 -9.425,12.475 U3.2
  Bottom Layer w0.2: R17.2@-9.6,12.1 v1(-9.6,11.9) -9.6,13.2 R16.1
NetR18_2: R18.2 S2.2 U4.3 | length 14.7
  Top Layer w0.2: v1(-9.3,9.1) -8.725,8.525 U4.3
  Bottom Layer w0.2: v1(-9.3,9.1) -5.8,9.1 -5.5,8.8 R18.2 -4.7,8.4 -4.4,8.1 -4.4,6.94 S2.2
NetR25_1: R25.1 R26.2 U3.5 | length 2.3
  Top Layer w0.2: U3.5 -10.825,13.775 v1(-10.7,13.9)
  Bottom Layer w0.2: R25.1 R26.2 v1(-10.7,13.9)
OCC_H: U1.14 U3.1 | length 14.6
  Top Layer w0.2: U3.1 -6.975,11.825 -6.7,12.1 -6.7,14.6 -4.35,16.95 U1.14
OCC_L: U1.13 U3.7 | length 22.4
  Top Layer w0.2: v1(-13.525,12.475) U3.7 ; v1(-8.2,16.2) -7.5,16.2 -6.3,17.4 -1.963,17.4 -1.713,17.65 2.65,17.65 2.9,17.4 U1.13
  Bottom Layer w0.2: v1(-13.525,12.475) -13.525,14.475 -11.8,16.2 v1(-8.2,16.2)
PA0: U1.16
PA1: U1.17
PA2: U1.18
PA3: U1.19
PA4: P2.3 U1.20 | length 31
  Top Layer w0.2: v1(-5.6,5.1) -5.6,12.8 -4.7,13.7 U1.20
  Bottom Layer w0.2: P2.3 -11.09,-7.19 -5.6,-1.7 v1(-5.6,5.1)
PA5: U1.21 | length 13
  Top Layer w0.2: v1(-5.1,6.5) -5.1,12.5 -4.4,13.2 U1.21
PB0: U1.5
PB3: R3.2 S1.4 S3.6 S4.4 U1.52 | length 44.6
  Top Layer w0.2: U1.52 10.969,14.2 12.1,13.069 12.1,7.6 10.9,6.4 10.9,2.168 10.3,1.568 10.3,-0.4 10.4,-0.5 S4.4 11.8,-0.5 v1(12,-0.7)
  Bottom Layer w0.2: v1(1.5,-8.15) 1.781,-8.15 5.931,-4 11.1,-4 12.5,-2.6 12.5,-0.7 ; v1(10.5,14.2) 12.2,14.2 R3.2 ; v1(12,-0.7) 16.693,-0.7 17.893,-1.9 v1(19.4,-1.9)
PB4: R2.2 S1.6 S3.1 S4.6 U1.51 | length 46.7
  Top Layer w0.2: S1.6 v1(1.5,-6.85) ; U1.51 10.903,13.7 11.7,12.903 11.7,7.825 10.2,6.325 v1(10.2,2.2) 9.9,1.9 9.9,-1.1 10.35,-1.55 S4.6 v1(12,-2.2)
  Bottom Layer w0.2: v1(1.5,-6.85) 1.95,-6.85 6.6,-2.2 v1(12,-2.2) ; v1(10.1,13.7) 12.6,13.7 R2.2 ; v1(10.2,2.2) 11,1.4 15.2,1.4 16,0.6 18.9,0.6 19.4,1.1 v1(19.4,1.9)
PB6: P7.8 U1.49 | length 13.4
  Top Layer w0.2: U1.49 v1(10.125,12.7)
  Bottom Layer w0.2: v1(10.125,12.7) 15,12.7 18.9,8.8 P7.8@18.9,6.3
PB7: P7.6 U1.48 | length 11.4
  Top Layer w0.2: U1.48 v1(10.5,12.2)
  Bottom Layer w0.2: v1(10.5,12.2) 13.9,12.2 16.9,9.2 P7.6@16.9,6.3
PC4: U1.9
PC5: C40.1 SW1.1 U1.8 | length 8.8
  Top Layer w0.2: U1.8 v1(5.4,19.8)
  Bottom Layer w0.2: C40.1 1.7,19.8 v1(5.4,19.8)
PC6: U1.7
PC7: U1.6
PD0: U1.25
PD1: U1.26
PD2: U1.27
PD3: U1.29
PD4: U1.30
PD5: U1.31
RESET: C15.1 P7.1 R1.1 U1.28 | length 17.5
  Top Layer w0.2: R1.1@0.7,9.7 U1.28
  Bottom Layer w0.2: v1(0.6,9.4) 0.6,5.7 1.8,4.5 12.7,4.5 P7.1@12.9,4.3
TCK: P7.4 U1.47 | length 9.5
  Top Layer w0.2: U1.47 v1(10.125,11.7)
  Bottom Layer w0.2: v1(10.125,11.7) 12.9,11.7 14.9,9.7 P7.4@14.9,6.3
TMS: P7.2 U1.46 | length 7.7
  Top Layer w0.2: U1.46 v1(10.5,11.2)
  Bottom Layer w0.2: v1(10.5,11.2) 12.2,11.2 12.9,10.5 P7.2@12.9,6.3
VIN: C11.1 P2.2 U2.1 U2.3 | length 12.5
  Top Layer w0.3: U2.1 -11.45,-0.55 -11.2,-0.3 -9.8,-0.3 -9.55,-0.55 U2.3
  Top Layer w0.5: P2.2 -13.63,-2.8 -11.9,-2.8 -11.45,-2.35 U2.1
VREF: C38.1 R17.1 R25.2 U4.5 | length 5.5
  Top Layer w0.2: U4.5 v1(-11.225,9.175)
  Bottom Layer w0.2: C38.1 R25.2 ; v1(-11.225,9.175) -10.7,9.7 R25.2 ; R17.1 R25.2
pads on no net: C1.0 C2.0 C3.0 C4.0 C5.0 C6.0 C7.0 C8.0 C9.0 C10.0 C11.0 C12.0 C13.0 C14.0 C15.0 C16.0 C17.0 C18.0 C19.0 C20.0 C21.0 C22.0 C23.0 C24.0 C25.0 C26.0 C27.0 C33.0 C34.0 C35.0 C36.0 C37.0 C38.0 C40.0 L2.0 L3.0 L4.0 L5.0 LED1.0 LED2.0 LED3.0 R1.0 R2.0 R3.0 R4.0 R5.0 R7.0 R9.0 R10.0 R13.0 R14.0 R15.0 R16.0 R17.0 R18.0 R19.0 R21.0 R22.0 R25.0 R26.0 R28.0 S1.7 S3.0 S3.3 S3.4 S4.2 S4.3 S4.13 S4.15 S4.16 SW1.0 U2.0 Y2.0 Y2.NC
copper on no net:
  other v1: -3,19

## Polygon pours and split planes (outlines as drawn)
GND on Top Layer "Top Layer-GND" (solid, remove dead copper, pour order 0): 0,21.5 -21.5,21.5 -21.5,0.3 -21.5,-9.6 21.5,-9.6 21.5,0.2 21.5,21.5
GND on Bottom Layer "Top Layer-GND" (solid, remove dead copper, pour order 2): 0,21.5 -21.5,21.5 -21.5,0.3 -21.5,-9.6 21.5,-9.6 21.5,0.2 21.5,21.5

## Keep-outs
Keep-Out Layer:
  lines w0.2: -13.411,-16.804 cw(c0,0) 13.411,-16.804 ; -13.4,-16.79 13.4,-16.79
  lines w0.8: 16.139,-1.664 ccw(c17.225,-1.664) 17.225,-2.75 ; 16.139,1.664 cw(c17.225,1.664) 17.225,2.75 19.9,2.75 ; 17.125,-2.75 19.9,-2.75

## Silkscreen, mask and mechanical layers (free items; w line width, h text height)
Top Overlay:
  lines w0.2: -17.8,-8.3 -17.8,-7 -17.4,-6.6 -7.5,-6.6 -7.1,-7 -7.1,-8.3 ; -13.411,-16.804 cw(c0,0) 13.411,-16.804 ; -13.4,-16.79 13.4,-16.79
  text "GND" at -16.9,-6.1 h0.5
  text "Vin" at -14.4,-6.1 h0.5
  text "PA4" at -11.7,-6.1 h0.5
  text "PA6" at -9.2,-6.1 h0.5
Bottom Overlay:
  drawing of 14 lines, arcs and shapes, not listed
  text "v1.2" at -3.7,-14.7 h0.7